# Altium PCB Sensor_Glove-X01.PcbDoc (part 4 of 4)
Units mm, origin at the board's own origin, x right, y up, seen from the top; angles counter-clockwise.
Board outline 58.67 x 37.59 mm, 2 copper layers (Top Layer, Bottom Layer), stack 1.711 mm thick; 126 components, 71 nets, 384 pads, 113 vias.
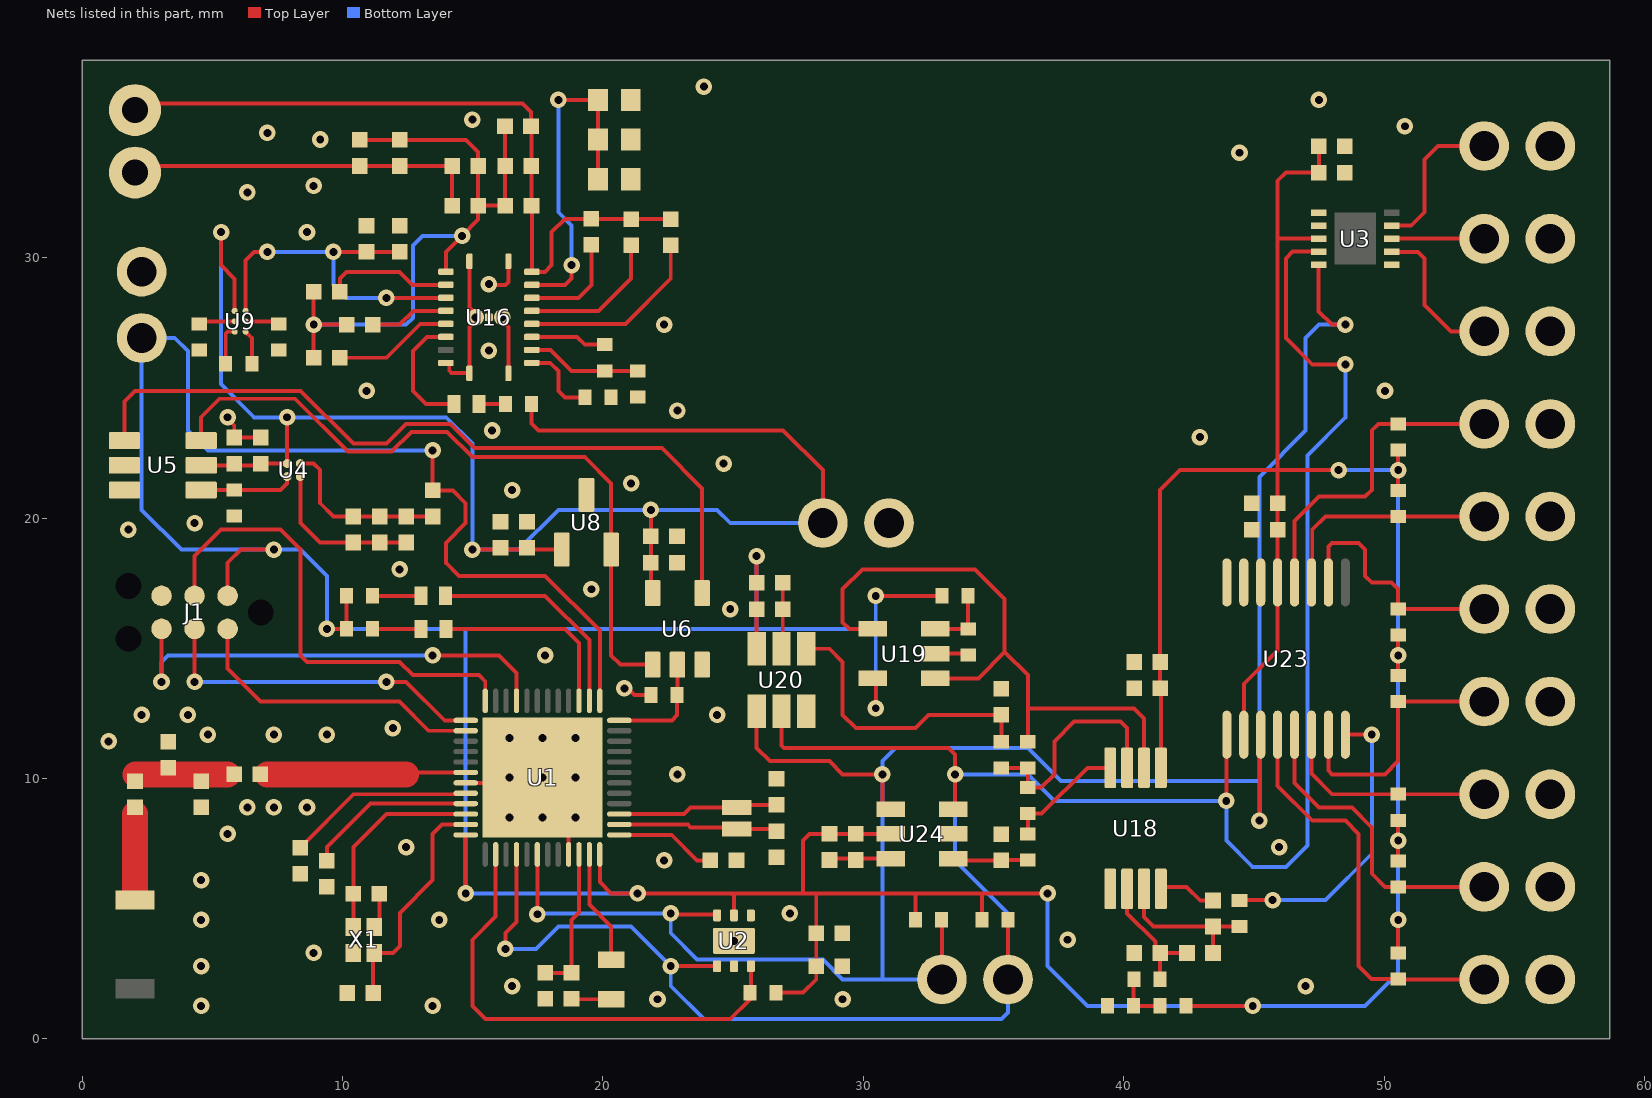
[diagram p2: the nets of this part, all layers, seen from the top]

## Via types
v1: diameter 0.635, hole 0.305, Top Layer to Bottom Layer, 112 vias
v2: diameter 0.635, hole 0.305, Top Layer to Bottom Layer, tented top, 1 vias

## Nets (pads, with @x,y where several pads share a name; then routed paths per layer and width w, separated by ;. In a path a pad name is that pad's centre, name@x,y a point inside that pad or via, vN(x,y) a via of type N, cw(c..) or ccw(c..) an arc to the next point about the centre after c; other vN are vias at no path point) (continued)
NetR13_1: (continued)
  Top Layer w0.152: U16.14@17.272,26.964 19.01,26.964 19.312,26.662 R13.1@20.066,26.662
NetR14_1: R14.1 U16.12 | length 3
  Top Layer w0.152: U16.12@17.272,25.964 17.978,25.964 18.288,25.654 18.288,24.892 18.542,24.638 R14.1@19.304,24.638
NetR24_1: R24.1 R25.2 U18.8 | length 4.7
  Top Layer w0.152: R24.1@36.322,7.874 R25.2@36.322,8.652 36.846,8.652 38.608,10.414 U18.8@39.482,10.414
NetR25_1: R25.1 R31.2 R32.1 U18.7 | length 9
  Top Layer w0.152: R32.1@35.306,10.414 R31.2@36.322,10.414 R25.1@36.322,9.652 36.83,9.652 37.338,10.16 37.338,11.43 38.1,12.192 39.878,12.192 40.132,11.938 U18.7@40.132,10.414
NetR31_1: R31.1 U18.6 U19.1 U19.4 | length 25
  Top Layer w0.152: U19.4@30.366,15.748 29.464,15.748 29.21,16.002 29.21,17.272 29.972,18.034 34.29,18.034 35.433,16.891 35.433,14.859 ; U19.1@32.766,13.848 34.422,13.848 35.433,14.859 ; R31.1@36.338,11.43 R31.1@36.322,11.414 36.322,12.692 ; U18.6@40.782,10.414 40.782,12.304 40.394,12.692 36.322,12.692 ; 35.433,14.859 36.322,13.97 36.322,12.692
NetR33_2: R33.2 R35.1 U19.3 | length 2.5
  Top Layer w0.152: U19.3@32.766,15.748 R35.1@34.036,15.748 34.028,15.756 R33.2@34.028,17.018
NetU5_1: U5.1 U6.4 | length 30.1
  Top Layer w0.152: U5.1@1.622,22.982 1.622,24.482 2.032,24.892 8.382,24.892 10.414,22.86 11.684,22.86 12.446,23.622 14.147,23.622 15.075,22.695 22.263,22.695 23.81,21.148 U6.4@23.81,17.123
nRESET: J1.3 U1.24 | length 18.6
  Top Layer w0.152: J1.3@4.318,17.018 4.318,18.542 5.334,19.558 7.62,19.558 8.382,18.796 8.382,14.732 8.636,14.478 12.192,14.478 12.7,13.97 15.24,13.97 15.482,13.728 U1.24@15.482,12.986
SCL_I2C: R5.2 TP1.2 U1.40 U2.1 U3.9 U20.5 U23.1 U24.3 | length 94.9
  Top Layer w0.152: v1(16.256,3.461) 16.256,4.064 16.682,4.49 U1.40@16.682,7.086 ; v1(22.606,2.794) U2.1@24.384,2.794 ; U20.5@26.858,12.586 26.858,11.265 26.947,11.176 33.274,11.176 33.528,10.922 v1(33.528,10.16) 33.528,8.894 U24.3@33.458,8.824 ; TP1.2@35.56,2.286 R5.2@35.56,4.572 ; v1(43.942,9.144) 43.953,9.155 43.953,11.673 U23.1@43.964,11.684 ; U3.9@47.492,30.234 46.49,30.234 46.228,29.972 46.228,26.924 47.244,25.908 v1(48.514,25.908)
  Bottom Layer w0.152: v1(16.256,3.461) 17.431,3.461 18.288,4.318 21.082,4.318 v1@22.657,2.743 ; v1(22.606,2.794) 22.606,2.032 23.876,0.762 35.306,0.762 35.56,1.016 TP1.2@35.56,2.286 35.56,4.826 33.528,6.858 v1(33.528,10.16) 36.322,10.16 37.338,9.144 v1(43.942,9.144) 43.942,7.62 44.958,6.604 46.228,6.604 47.053,7.429 47.053,22.415 48.514,23.876 v1(48.514,25.908)
SDA_I2C: R7.2 TP1.1 U1.42 U2.6 U3.10 U20.4 U23.3 U24.4 | length 82.6
  Top Layer w0.152: v1(17.482,4.788) U1.42@17.482,7.086 ; v1(22.606,4.826) 22.647,4.785 24.343,4.785 U2.6@24.384,4.744 ; U20.4@25.908,12.586 25.908,11.176 26.416,10.668 28.702,10.668 29.21,10.16 v1(30.734,10.16) 30.734,9.048 30.958,8.824 U24.4@31.058,8.824 ; R7.2@33.012,4.572 33.02,4.564 TP1.1@33.02,2.286 ; v1(45.212,8.382) 45.238,8.408 45.238,11.658 U23.3@45.264,11.684 ; U3.10@47.492,29.734 47.492,27.946 48.006,27.432 v1(48.514,27.432)
  Bottom Layer w0.152: v1(17.482,4.788) 17.52,4.826 v1(22.606,4.826) 22.606,4.064 23.622,3.048 28.448,3.048 29.21,2.286 30.734,2.286 ; TP1.1@33.02,2.286 30.734,2.286 ; v1(45.212,8.382) 45.212,9.906 ; v1(48.514,27.432) 47.498,27.432 46.99,26.924 46.99,23.368 45.212,21.59 45.212,9.906 ; 30.734,2.286 v1(30.734,10.16) 30.734,10.668 31.242,11.176 36.322,11.176 37.592,9.906 45.212,9.906
SG_S1: R10.2 TP25.2 U23.4 | length 16
  Top Layer w0.152: U23.4@45.914,11.684 45.914,9.712 47.244,8.382 48.514,8.382 49.022,7.874 49.022,2.794 49.522,2.294 R10.2@50.546,2.294 ; R10.2@50.546,2.286 TP25.2@53.848,2.286
SG_S2: R22.2 TP45.2 U23.5 | length 11.8
  Top Layer w0.152: U23.5@46.564,11.684 46.564,9.824 47.498,8.89 48.768,8.89 49.53,8.128 49.53,6.35 50.038,5.842 R22.2@50.546,5.842 TP45.2@53.848,5.842
SG_S3: R1.2 TP2.2 U23.6 | length 8.5
  Top Layer w0.152: U23.6@47.214,11.684 47.214,10.19 48.006,9.398 R1.2@50.546,9.398 TP2.2@53.848,9.398
SG_S4: R2.2 TP4.2 U23.7 | length 9.9
  Top Layer w0.152: U23.7@47.864,11.684 47.864,10.302 48.006,10.16 50.038,10.16 50.546,10.668 R2.2@50.546,12.954 TP4.2@53.848,12.954
SG_S5: R3.2 TP7.2 U23.12 | length 12.5
  Top Layer w0.152: U23.12@46.564,17.534 46.564,19.894 47.498,20.828 49.276,20.828 49.53,21.082 49.53,23.368 49.784,23.622 R3.2@50.546,23.622 TP7.2@53.848,23.622
SG_S6: R20.2 TP8.2 U23.11 | length 8.9
  Top Layer w0.152: U23.11@47.214,17.534 47.244,17.564 47.244,19.558 47.752,20.066 R20.2@50.546,20.066 TP8.2@53.848,20.066
SG_S7: R21.2 TP9.2 U23.10 | length 9.5
  Top Layer w0.152: U23.10@47.864,17.534 47.864,18.908 48.006,19.05 49.022,19.05 49.276,18.796 49.276,17.78 49.53,17.526 50.292,17.526 50.546,17.272 R21.2@50.546,16.51 TP9.2@53.848,16.51
SWD_CLK: J1.4 U1.25 | length 13.1
  Top Layer w0.152: v1(4.318,13.716) J1.4@4.318,15.748 ; v1(11.684,13.716) 12.446,13.716 13.926,12.236 U1.25@14.732,12.236
  Bottom Layer w0.152: v1(4.318,13.716) v1(11.684,13.716)
SWD_IO: J1.2 U1.26 | length 11.7
  Top Layer w0.152: J1.2@5.588,15.748 5.588,14.224 6.858,12.954 12.192,12.954 13.31,11.836 U1.26@14.732,11.836
SWD_O: J1.6 U1.21 | length 17.9
  Top Layer w0.152: v1(3.048,13.716) J1.6@3.048,15.748 ; v1(13.462,14.732) 16.002,14.732 16.682,14.052 U1.21@16.682,12.986
  Bottom Layer w0.152: v1(3.048,13.716) 3.048,14.478 3.302,14.732 v1(13.462,14.732)
TMP117_ALERT: R17.2 U1.38 U2.3 | length 18.7
  Top Layer w0.152: U1.38@15.882,7.086 15.882,4.706 14.986,3.81 14.986,1.27 15.494,0.762 24.892,0.762 25.684,1.554 U2.3@25.684,2.794
V_BATT: C35.1 C37.2 C38.1 C39.2 C40.1 C41.2 J4.1 R6.2 U4.A1 U5.5 U6.5 U8.1 U9.A1 | length 64.5
  Top Layer w0.152: U5.5@4.572,22.032 6.792,22.032 C35.1@6.858,22.098 U4.A1@7.874,22.098 v1(7.874,23.876) ; v1(5.334,30.988) 5.334,29.718 5.857,29.195 U9.A1@5.857,27.963 ; v1(14.986,18.796) U8.1@18.42,18.796 ; R6.2@17.256,24.384 17.256,23.638 17.526,23.368 26.924,23.368 28.448,21.844 J4.1@28.448,19.812 ; v1(21.844,20.32) C40.1@21.844,19.304 C41.2@21.844,18.288 21.844,17.189 U6.5@21.91,17.123
  Bottom Layer w0.152: v1(5.334,30.988) 5.334,25.146 6.604,23.876 v1(7.874,23.876) 13.97,23.876 14.986,22.86 v1(14.986,18.796) 16.764,18.796 18.288,20.32 v1(21.844,20.32) 24.384,20.32 24.892,19.812 J4.1@28.448,19.812
V_WC: C20.2 C21.2 U9.A2 U16.4 | length 13.8
  Top Layer w0.152: U9.A2@6.277,27.963 6.277,29.899 6.604,30.226 v1(7.112,30.226) ; v1(9.652,30.226) C21.2@10.922,30.226 C20.2@12.192,30.226 ; v1(11.684,28.464) U16.4@13.972,28.464
  Bottom Layer w0.152: v1(7.112,30.226) v1(9.652,30.226) 9.652,28.956 10.144,28.464 v1(11.684,28.464)
VCC: C1.1 C28.1 C29.2 C34.1 C60.1 C61.1 C64.1 C65.1 C69.1 C70.1 C71.1 C72.1 J1.1 L6.2 R1.1 R2.1 R3.1 R4.1 R5.1 R7.1 R10.1 R16.1 R17.1 R19.1 R20.1 R21.1 R22.1 R33.1 TP37.1 U1.13 U1.36 U1.48 U2.5 U3.8 U18.5 U19.5 U20.3 U23.2 U23.13 U24.5 | length 230.1
  Top Layer w0.152: J1.1@5.588,17.018 5.588,18.288 6.096,18.796 v1(7.366,18.796) ; v1(9.398,15.748) R4.1@10.16,15.748 R16.1@10.16,17.018 ; v1(13.462,22.606) L6.2@13.462,21.066 14.24,21.066 14.732,20.574 14.732,19.812 13.97,19.05 13.97,18.288 14.478,17.78 17.78,17.78 19.882,15.678 U1.13@19.882,12.986 ; v1(14.732,5.588) U1.36@14.732,7.836 ; U1.48@19.882,7.086 19.882,6.026 20.32,5.588 v1(21.336,5.588) 24.945,5.588 ; U2.5@25.034,4.744 25.034,5.499 24.945,5.588 ; U20.3@25.908,14.986 C64.1@25.908,16.51 C65.1@25.908,17.526 v1(25.908,18.542) ; R17.1@26.654,1.778 27.686,1.778 28.194,2.286 C28.1@28.194,2.794 C29.2@28.194,4.064 28.194,5.588 ; U19.5@30.366,13.848 30.48,13.734 v1(30.48,12.7) ; v1(30.48,17.018) R33.1@33.028,17.018 ; U24.5@31.058,7.874 C69.1@29.718,7.874 C70.1@28.702,7.874 27.94,7.874 27.686,7.62 27.686,5.588 ; R7.1@32.012,4.572 32.012,5.588 ; R5.1@34.56,4.572 34.56,5.576 34.548,5.588 ; v1(37.084,5.588) 34.548,5.588 ; U18.5@41.432,10.414 41.432,13.432 C61.1@41.402,13.462 C60.1@41.402,14.478 41.402,21.082 42.164,21.844 45.914,21.844 ; R19.1@42.402,1.27 v1(44.958,1.27) ; U23.2@44.614,11.684 44.614,13.626 45.914,14.926 U23.13@45.914,17.534 C72.1@45.914,19.558 C71.1@45.914,20.574 45.914,21.844 ; U3.8@47.492,30.734 45.914,30.734 ; C1.1@47.498,34.29 C34.1@47.498,33.274 46.228,33.274 45.914,32.96 45.914,30.734 ; v1(48.26,21.844) 45.914,21.844 ; R10.1@50.546,3.294 v1(50.546,4.572) ; R22.1@50.546,6.842 v1(50.546,7.62) R1.1@50.546,8.398 ; R2.1@50.546,13.954 v1(50.546,14.732) R21.1@50.546,15.51 ; R20.1@50.546,21.066 v1(50.546,21.844) R3.1@50.546,22.622 ; 24.945,5.588 27.686,5.588 ; 27.686,5.588 28.194,5.588 ; 28.194,5.588 32.012,5.588 ; 32.012,5.588 34.548,5.588 ; 45.914,21.844 45.914,30.734
  Bottom Layer w0.152: v1(13.462,22.606) 4.826,22.606 4.064,23.368 4.064,26.416 3.556,26.924 TP37.1@2.286,26.924 2.286,20.32 3.81,18.796 v1(7.366,18.796) 8.382,18.796 9.398,17.78 v1(9.398,15.748) 14.732,15.748 ; v1(21.336,5.588) v1(14.732,5.588) 14.732,15.748 ; v1(25.908,18.542) 25.908,15.748 ; v1(30.48,12.7) 30.48,15.748 ; v1(30.48,17.018) 30.48,15.748 ; v1(37.084,5.588) 37.084,2.794 38.608,1.27 v1(44.958,1.27) 49.276,1.27 50.546,2.54 v1(50.546,4.572) v1(50.546,7.62) v1(50.546,14.732) v1(50.546,21.844) v1(48.26,21.844) ; 14.732,15.748 25.908,15.748 ; 25.908,15.748 30.48,15.748
WB_REF_DAC: C63.1 R32.2 U20.1 | length 11.2
  Top Layer w0.152: U20.1@27.808,14.986 28.702,14.986 29.21,14.478 29.21,12.446 29.718,11.938 32.004,11.938 32.512,12.446 C63.1@35.306,12.446 R32.2@35.306,11.414
WB_V1: R37.1 U23.8 | length 11.4
  Top Layer w0.152: R37.1@44.45,5.318 44.466,5.334 v1(45.72,5.334) ; U23.8@48.514,11.684 v1(49.53,11.684)
  Bottom Layer w0.152: v1(45.72,5.334) 47.752,5.334 49.53,7.112 v1(49.53,11.684)
WB_V2: R19.2 R23.1 R36.1 | length 2
  Top Layer w0.152: R36.1@40.402,2.286 40.386,2.27 R23.1@40.386,1.27 R19.2@41.402,1.27
WB_V_OUT: C62.1 R24.2 U24.1 | length 2.9
  Top Layer w0.152: U24.1@33.458,6.924 33.524,6.858 C62.1@35.306,6.858 35.322,6.874 R24.2@36.322,6.874
pads on no net: E1.2 J1.7 U1.4 U1.5 U1.6 U1.7 U1.8 U1.9 U1.10 U1.11 U1.16 U1.17 U1.18 U1.19 U1.20 U1.22 U1.23 U1.27 U1.28 U1.29 U1.37 U1.39 U1.41 U1.43 U1.44 U3.5 U3.11 U16.8 U23.9
copper on no net: | length 0
  Top Layer w0.152: 20.632,11.436 20.638,11.43
  other v2: 48.892,30.734

## Polygon pours and split planes (outlines as drawn)
GND on Top Layer "GND_L01_P000" (solid, remove dead copper, pour order 0): 3.81,0 3.81,8.382 0,8.382 0,37.592 58.674,37.592 58.674,0
GND on Bottom Layer "GND_L02_P001" (solid, remove dead copper, pour order 1): 3.81,0 3.81,8.382 0,8.382 0,37.592 58.674,37.592 58.674,0

## Keep-outs
Keep-Out Layer:
  the board outline again, w0.254

## Silkscreen, mask and mechanical layers (free items; w line width, h text height)
Top Overlay:
  lines w0.254: 0.254,0.254 58.42,0.254 58.42,37.338 0.254,37.338 0.254,0.254
Bottom Overlay:
  lines w0.254: 0.254,0.254 58.42,0.254 58.42,37.338 0.254,37.338 0.254,0.254
Board_Outline:
  the board outline again, w0.254